# EAGLE board QL_keyboard (EAGLE 7.5.0)
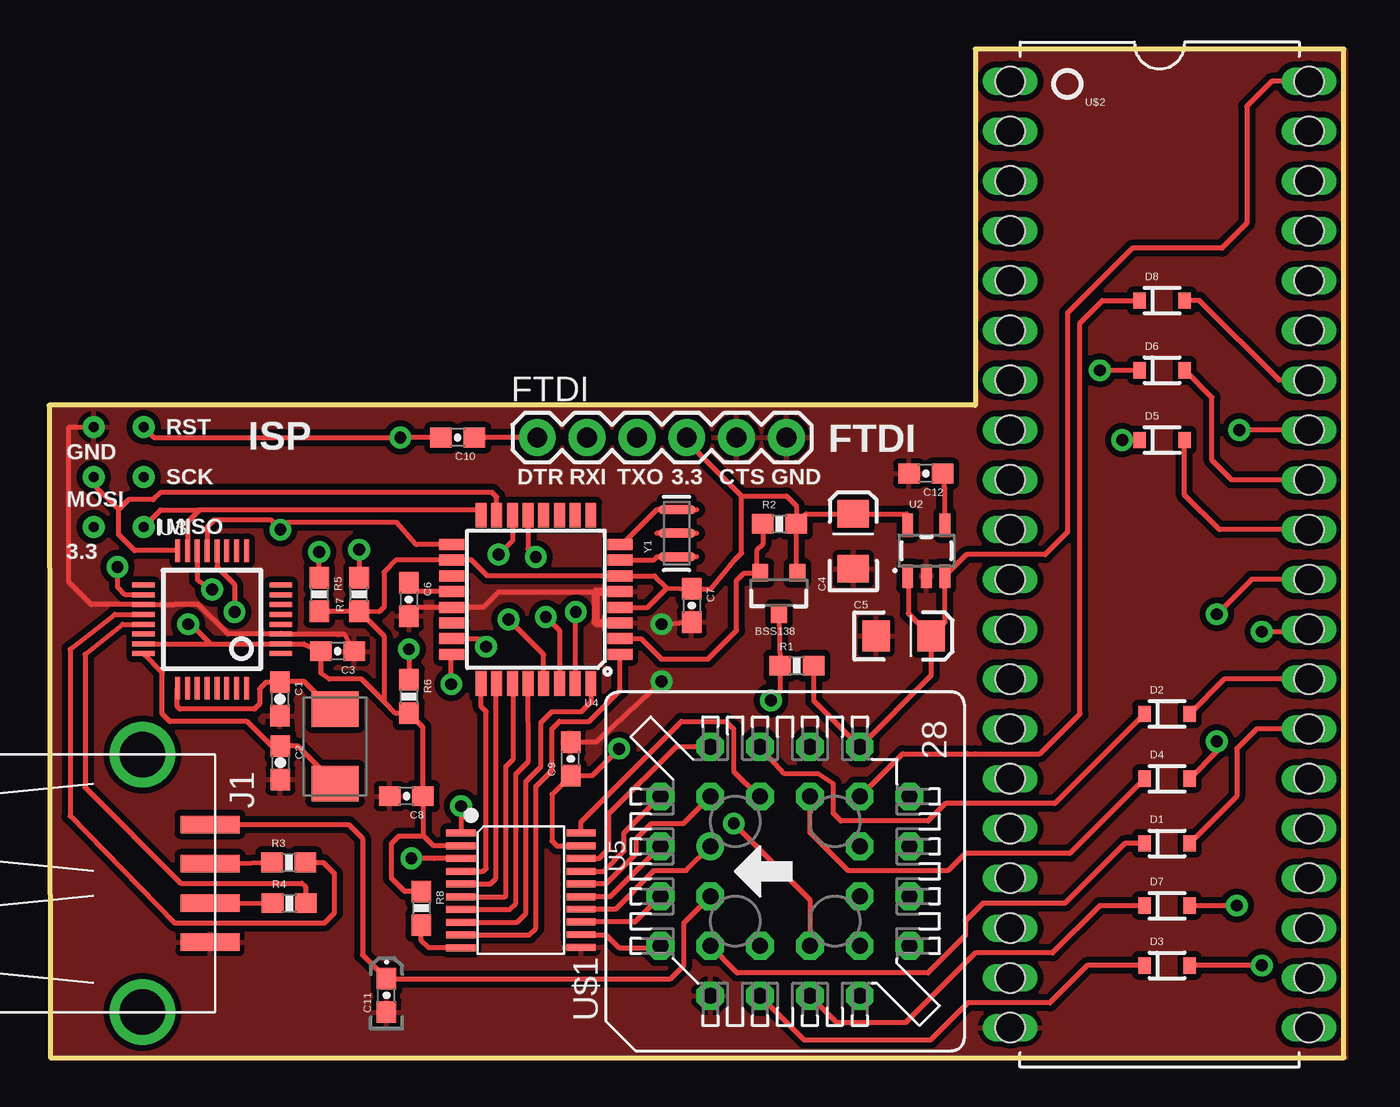
[diagram p0: board, top side]
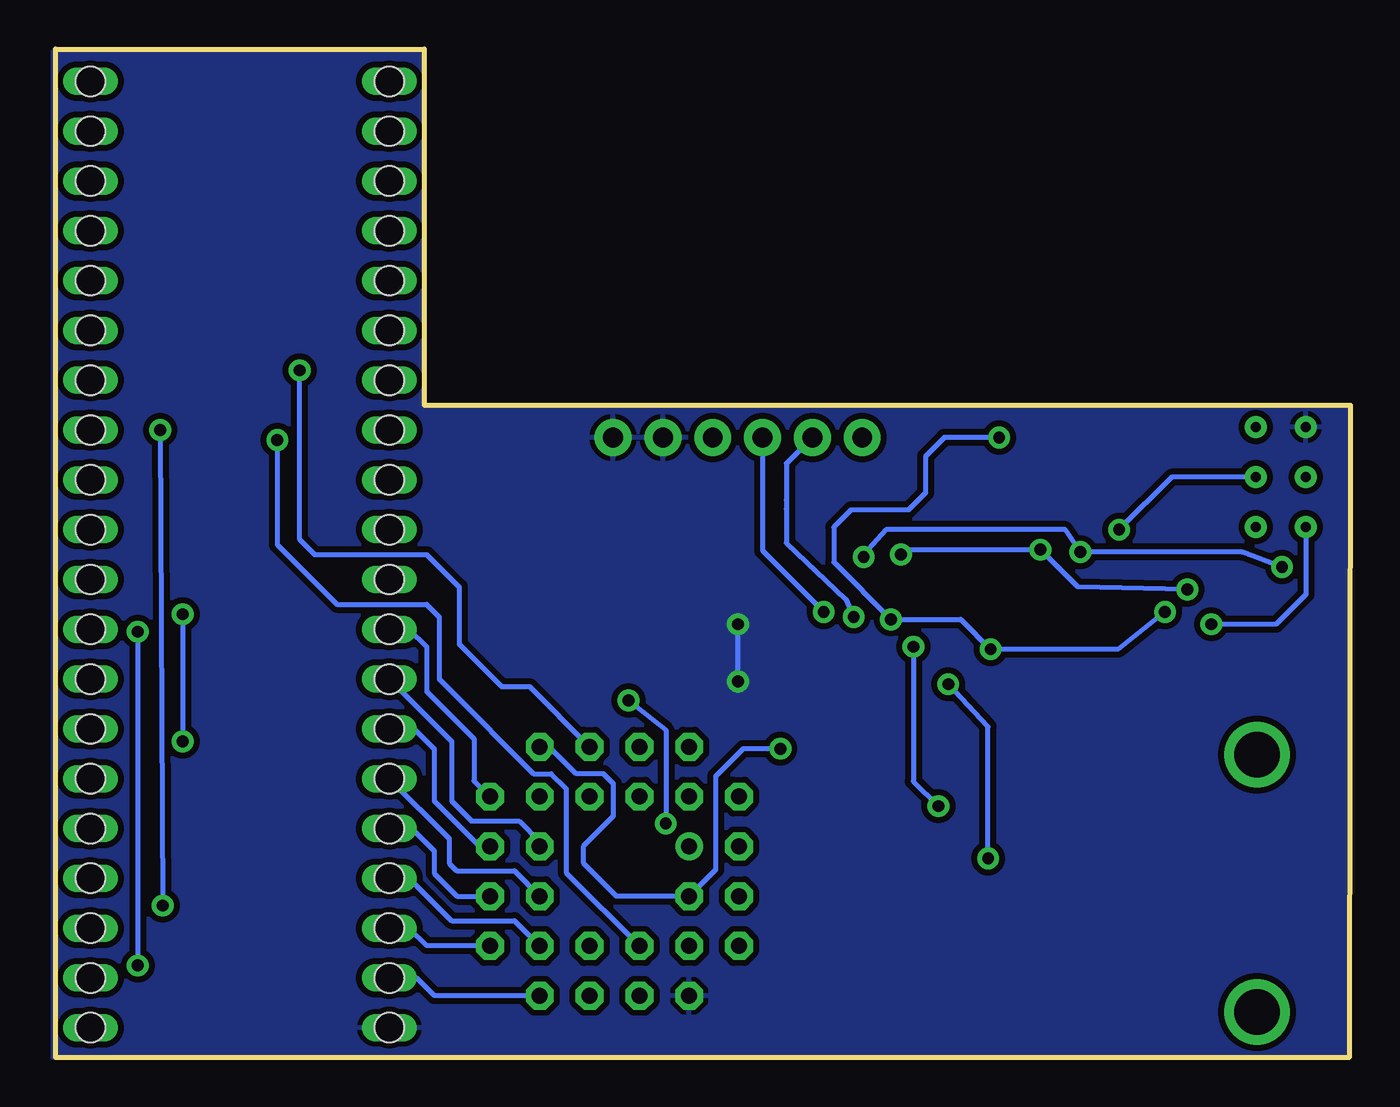
[diagram p1: board, bottom side, seen from below]

Size 66.03 x 51.44 mm. Coordinates in mm from the lower left corner, seen from the top.
Copper layers (1*16): Top 0.035mm / dielectric 1.5mm / Bottom 0.035mm
Design rules "SeeedStudio_2layer_DRU_no_angle_20140221 *": minimum track width 10mil, minimum drill 12mil, track to track 8mil, track to pad 8mil, pad to pad 8mil, via to via 10mil, smd to smd 0mil, copper to edge 10mil, drill to drill 10mil, minimum pad ring 12mil, minimum via ring 10mil, stop-mask expansion 2mil, vias tented up to drill 100mil, thermal gap 10mil
Milling: area 0,0 to 66,51.4

## Footprints (pad centres in the part's own frame; a part is rotated, then mirrored left to right if it is on the bottom)
SOT23-3 = smd 0.8 x 0.9: 1 -0.95,-1; 2 0.95,-1; 3 0,1.1
0603-CAP = smd 1.1 x 1: 1 -0.85,0; 2 0.85,0
EIA3216 = smd 1.4 x 1.6: A 1.4,0; C -1.4,0
0603-POL = smd 1.1 x 1: A 0.85,0; K -0.85,0
SOD-323 = smd 0.63 x 0.83: A 1.15,0; C -1.15,0
1X06 = drill 1.016 pad 1.88: 1 0,0; 2 2.54,0; 3 5.08,0; 4 7.62,0; 5 10.16,0; 6 12.7,0
USB-A-S = smd 3 x 0.9: D+ 3.45,-1; D- 3.45,1; GND 3.45,-3; VBUS 3.45,3 | drill 2.311: P$5 0,-6.566; P$6 0,6.566
2X3_TEST_POINTS = drill 0.508: 1 -2.54,-1.27; 2 -2.54,1.27; 3 0,-1.27; 4 0,1.27; 5 2.54,-1.27; 6 2.54,1.27
0603-RES = smd 1.1 x 1: 1 -0.85,0; 2 0.85,0
SOT23-5 = smd 0.55 x 1.2: 1 -0.95,-1.3; 2 0,-1.3; 3 0.95,-1.3; 4 0.95,1.3; 5 -0.95,1.3
TQFP32-5MM = smd 1.143 x 0.254: 1 -3.5,1.75; 2 -3.5,1.25; 3 -3.5,0.75; 4 -3.5,0.25; 5 -3.5,-0.25; 6 -3.5,-0.75; 7 -3.5,-1.25; 8 -3.5,-1.75; 17 3.5,-1.75; 18 3.5,-1.25; 19 3.5,-0.75; 20 3.5,-0.25; 21 3.5,0.25; 22 3.5,0.75; 23 3.5,1.25; 24 3.5,1.75 | smd 0.254 x 1.143: 9 -1.75,-3.5; 10 -1.25,-3.5; 11 -0.75,-3.5; 12 -0.25,-3.5; 13 0.25,-3.5; 14 0.75,-3.5; 15 1.25,-3.5; 16 1.75,-3.5; 25 1.75,3.5; 26 1.25,3.5; 27 0.75,3.5; 28 0.25,3.5; 29 -0.25,3.5; 30 -0.75,3.5; 31 -1.25,3.5; 32 -1.75,3.5
TQFP32-08 = smd 1.27 x 0.559: 1 -4.293,2.8; 2 -4.293,2; 3 -4.293,1.2; 4 -4.293,0.4; 5 -4.293,-0.4; 6 -4.293,-1.2; 7 -4.293,-2; 8 -4.293,-2.8; 17 4.293,-2.8; 18 4.293,-2; 19 4.293,-1.2; 20 4.293,-0.4; 21 4.293,0.4; 22 4.293,1.2; 23 4.293,2; 24 4.293,2.8 | smd 0.559 x 1.27: 9 -2.8,-4.293; 10 -2,-4.293; 11 -1.2,-4.293; 12 -0.4,-4.293; 13 0.4,-4.293; 14 1.2,-4.293; 15 2,-4.293; 16 2.8,-4.293; 25 2.8,4.293; 26 2,4.293; 27 1.2,4.293; 28 0.4,4.293; 29 -0.4,4.293; 30 -1.2,4.293; 31 -2,4.293; 32 -2.8,4.293
TSSOP20-0.65-6.5X4.4MM = smd 0.35 x 1.5: 1 -2.925,-3.065; 2 -2.275,-3.065; 3 -1.625,-3.065; 4 -0.975,-3.065; 5 -0.325,-3.065; 6 0.325,-3.065; 7 0.975,-3.065; 8 1.625,-3.065; 9 2.275,-3.065; 10 2.925,-3.065; 11 2.91,3.065; 12 2.26,3.065; 13 1.61,3.065; 14 0.96,3.065; 15 0.325,3.065; 16 -0.325,3.065; 17 -0.975,3.065; 18 -1.625,3.065; 19 -2.275,3.065; 20 -2.925,3.065
S28 = drill 0.813: 1 1.27,3.81 | drill 0.813 octagon: 2 -1.27,6.35; 3 -1.27,3.81; 4 -3.81,6.35; 5 -6.35,3.81; 6 -3.81,3.81; 7 -6.35,1.27; 8 -3.81,1.27; 9 -6.35,-1.27; 10 -3.81,-1.27; 11 -6.35,-3.81; 12 -3.81,-6.35; 13 -3.81,-3.81; 14 -1.27,-6.35; 15 -1.27,-3.81; 16 1.27,-6.35; 17 1.27,-3.81; 18 3.81,-6.35; 19 6.35,-3.81; 20 3.81,-3.81; 21 6.35,-1.27; 22 3.81,-1.27; 23 6.35,1.27; 24 3.81,1.27; 25 6.35,3.81; 26 3.81,6.35; 27 3.81,3.81; 28 1.27,6.35
DIL40 = drill 0.8 long: 1 -24.13,-7.62; 2 -21.59,-7.62; 3 -19.05,-7.62; 4 -16.51,-7.62; 5 -13.97,-7.62; 6 -11.43,-7.62; 7 -8.89,-7.62; 8 -6.35,-7.62; 9 -3.81,-7.62; 10 -1.27,-7.62; 11 1.27,-7.62; 12 3.81,-7.62; 13 6.35,-7.62; 14 8.89,-7.62; 15 11.43,-7.62; 16 13.97,-7.62; 17 16.51,-7.62; 18 19.05,-7.62; 19 21.59,-7.62; 20 24.13,-7.62; 21 24.13,7.62; 22 21.59,7.62; 23 19.05,7.62; 24 16.51,7.62; 25 13.97,7.62; 26 11.43,7.62; 27 8.89,7.62; 28 6.35,7.62; 29 3.81,7.62; 30 1.27,7.62; 31 -1.27,7.62; 32 -3.81,7.62; 33 -6.35,7.62; 34 -8.89,7.62; 35 -11.43,7.62; 36 -13.97,7.62; 37 -16.51,7.62; 38 -19.05,7.62; 39 -21.59,7.62; 40 -24.13,7.62 | hole 1.5: -24.13,-7.62; -21.59,-7.62; -19.05,-7.62; -16.51,-7.62; -13.97,-7.62; -11.43,-7.62; -8.89,-7.62; -6.35,-7.62; -3.81,-7.62; -1.27,-7.62; 1.27,-7.62; 3.81,-7.62; 6.35,-7.62; 8.89,-7.62; 11.43,-7.62; 13.97,-7.62; 16.51,-7.62; 19.05,-7.62; 21.59,-7.62; 24.13,-7.62; 24.13,7.62; 21.59,7.62; 19.05,7.62; 16.51,7.62; 13.97,7.62; 11.43,7.62; 8.89,7.62; 6.35,7.62; 3.81,7.62; 1.27,7.62; -1.27,7.62; -3.81,7.62; -6.35,7.62; -8.89,7.62; -11.43,7.62; -13.97,7.62; -16.51,7.62; -19.05,7.62; -21.59,7.62; -24.13,7.62
CRYSTAL-SMD-5X3.2 = smd 1.8 x 2.4: 1 -1.9,0; 2 1.9,0
RESONATOR-SMD = smd 0.45 x 1.905: 1 -1.2,0; 2 0,0; 3 1.2,0

## Placement (x,y rotation side)
BSS138  200mA/50V  [SOT23-3]  37.22,23.72 180 top
C1  18pF  [0603-CAP]  11.77,18.29 270 top
C2  18pF  [0603-CAP]  11.8,15.03 270 top
C3  1.0uF  [0603-CAP]  14.72,20.72 180 top
C4  10uF  [EIA3216]  41.01,26.33 90 top
C5  10uF  [EIA3216]  43.57,21.5 0 top
C6  0.1uF  [0603-CAP]  18.35,23.36 270 top
C7  0.1uF  [0603-CAP]  32.77,23.06 270 top
C8  0.1uF  [0603-CAP]  18.22,13.33 180 top
C9  0.1uF  [0603-CAP]  26.61,15.24 90 top
C10  0.1uF  [0603-CAP]  20.84,31.62 180 top
C11  4.7uF  [0603-POL]  17.21,3.17 90 top
C12  470pF  [0603-CAP]  44.71,29.79 180 top
D1  BAT20J  [SOD-323]  57.01,10.92 0 top
D2  BAT20J  [SOD-323]  57.01,17.53 0 top
D3  BAT20J  [SOD-323]  57.01,4.7 0 top
D4  BAT20J  [SOD-323]  57.01,14.22 0 top
D5  BAT20J  [SOD-323]  56.76,31.5 0 top
D6  BAT20J  [SOD-323]  56.76,35.05 0 top
D7  BAT20J  [SOD-323]  57.01,7.75 0 top
D8  BAT20J  [SOD-323]  56.76,38.61 0 top
FTDI  1  [1X06]  24.9,31.62 0 top
J1  USB-A-S  [USB-A-S]  4.76,8.89 0 top
J2  AVR_SPI_PRG_6TESTPOINTS  [2X3_TEST_POINTS]  3.55,29.61 90 top
R1  10K  [0603-RES]  38.13,19.99 0 top
R2  10K  [0603-RES]  37.24,27.22 0 top
R3  33  [0603-RES]  12.23,9.95 0 top
R4  33  [0603-RES]  12.25,7.87 0 top
R5  2.2k  [0603-RES]  13.78,23.62 270 top
R6  10K  [0603-RES]  18.35,18.41 270 top
R7  2.2k  [0603-RES]  15.81,23.62 90 top
R8  2.2k  [0603-RES]  18.99,7.62 270 top
U2  3.3V/150mA  [SOT23-5]  44.74,25.85 0 top
U3  MAX3421ESMD  [TQFP32-5MM]  8.32,22.35 180 top
U4  ATMEGA328P_TQFP  [TQFP32-08]  24.83,23.36 180 top
U5  TXB0108PW-TSSOP20  [TSSOP20-0.65-6.5X4.4MM]  24.07,8.53 270 top
U$1  MT8808  [S28]  37.53,9.5 90 top
U$2  DIL40_SCKT  [DIL40]  56.63,25.65 270 top
XTAL-12MHZ  CRYSTAL-SMD  [CRYSTAL-SMD-5X3.2]  14.59,15.87 270 top
Y1  8MHZ  [RESONATOR-SMD]  32.01,26.74 90 top

## Library data of the parts
BSS138 = SparkFun-DiscreteSemi; PROD_ID: TRANS-00830
C1 C2 = SparkFun-Passives
C3 = SparkFun-Capacitors; PROD_ID: CAP-00868
C4 C5 = SparkFun-Capacitors; PROD_ID: CAP-00811
C6-C10 C12 = SparkFun-Capacitors; PROD_ID: CAP-07888
C11 = SparkFun-Capacitors; PROD_ID: CAP-13210
D1-D8 = SparkFun-DiscreteSemi; PROD_ID: DIO-11623
FTDI J1 J2 = SparkFun-Connectors
R1 R2 R6 = SparkFun-Resistors; PROD_ID: RES-00824
R3 R4 = SparkFun-Resistors; PROD_ID: RES-08270
R5 R7 R8 = SparkFun-Resistors; PROD_ID: RES-08272
U2 = SparkFun-PowerIC; PROD_ID: VREG-00822
U3 = SparkFun-DigitalIC
U4 = SparkFun-DigitalIC; PROD_ID: IC-09069
U5 = Seeed-OPL-ic; MPN: TXB0108PW
U$1 U$2 XTAL-12MHZ = ppe_custom
Y1 = SparkFun-FreqCtrl; PROD_ID: XTAL-08895

## Nets
3.3V: BSS138.1 C3.2 C4.A C7.1 C8.1 FTDI.4 J2.2 R2.2 R5.2 R6.2 R7.1 R8.1 U2.5 U3.2 U3.23 U4.4 U4.6 U4.18 U5.2
AREF: C6.1 U4.20
AX0: U5.20 U$1.24
AX1: U5.18 U$1.25
AX2: U5.17 U$1.26
AY0: U5.16 U$1.27
AY1: U5.15 U$1.28
AY2: U5.14 U$1.1
DTR: C10.1 FTDI.1
GND: C1.2 C2.2 C3.1 C4.C C5.C C6.2 C7.2 C8.2 C9.2 C11.K C12.2 FTDI.5 FTDI.6 J1.GND J2.6 U2.2 U3.3 U3.19 U4.3 U4.5 U4.21 U5.11 U$1.5 U$2.20 Y1.2
INT: R5.1 U3.18 U4.13
MAX_X0: C1.1 U3.25 XTAL-12MHZ.1
MAX_X1: C2.1 U3.24 XTAL-12MHZ.2
MISO: J2.1 U3.15 U4.16
MOSI: J2.4 U3.16 U4.15
N$1: J1.D- R3.1
N$2: R3.2 U3.20
N$3: R4.2 U3.21
N$4: J1.D+ R4.1
N$5: C12.1 U2.4
N$6: U4.23 U5.1
N$7: U4.24 U5.3
N$8: U4.25 U5.4
N$9: U4.26 U5.5
N$10: U4.27 U5.6
N$11: U4.28 U5.7
N$12: U4.32 U5.8
N$13: U5.12 U$1.4
N$14: U5.13 U$1.2
N$15: U4.8 Y1.3
N$16: U4.7 Y1.1
N$17: R8.2 U5.10
N$18: U4.1 U5.9
N$19: D1.C U$1.6
N$20: D2.C U$1.23
N$21: D3.C U$1.7
N$22: D4.C U$1.22
N$23: D5.C U$1.8
N$24: D6.C U$1.21
N$25: D7.C U$1.9
N$26: D8.C U$1.20
RST: C10.2 J2.5 R6.1 U3.12 U4.29
RST8808V5: BSS138.3 R1.1 U$1.10
RST8808V33: BSS138.2 R2.1 U4.2
RXI: FTDI.2 U4.30
SCK: J2.3 U3.13 U4.17
SS: R7.2 U3.14 U4.14
TXO: FTDI.3 U4.31
VCC: C5.A C9.1 C11.A J1.VBUS R1.2 U2.1 U2.3 U5.19 U$1.3 U$1.19 U$2.40
X0: D1.A U$2.27
X1: D2.A U$2.28
X2: D3.A U$2.29
X3: D4.A U$2.30
X4: D5.A U$2.31
X5: D6.A U$2.32
X6: D7.A U$2.33
X7: D8.A U$2.34
Y0: U$1.18 U$2.12
Y1: U$1.17 U$2.13
Y2: U$1.16 U$2.14
Y3: U$1.15 U$2.15
Y4: U$1.14 U$2.16
Y5: U$1.13 U$2.17
Y6: U$1.12 U$2.18
Y7: U$1.11 U$2.19

## Tracks (layer width: path | path; a pad name or v marks a point on that pad's centre or on a via)
3.3V  (via drill 0.6)
  Top 0.254: BSS138.1 38.09,24.79 R2.2 38.11,27.24 | U3.23 8.24,21.1 | 8.24,21.1 U3.2 12.98,21.1 C3.2 13.87,19.59 14.29,19.3 15.94,19.3 17.08,18.16 | 31.5,23.95 C7.1 33.75,23.91 35.06,25.47 35.31,25.72 35.31,28.64 | 35.31,28.64 37.6,28.64 38.11,28.14 38.11,27.24 | 17.08,18.16 17.68,17.56 R6.2 19.07,16.84 C8.1 19.11,13.29 19.11,11.3 | R7.1 16.83,22.73 17.08,22.98 17.08,24.76 17.68,25.36 U4.18 21.56,25.36 22.36,24.57 U4.6 30.89,24.57 31.5,23.95 | R7.1 17.08,21.5 17.08,18.16 | R5.2 R7.1 | 38.11,27.24 38.6,27.73 C4.A 43.72,27.73 43.82,27.63 43.82,27.19 U2.5 | U5.2 19.61,10.81 19.11,11.3 | R8.1 18.13,8.47 17.46,9.14 17.46,10.92 17.84,11.3 19.11,11.3 | U4.4 30.52,22.96 31.5,23.95 | FTDI.4 32.52,31.44 35.31,28.64 | v7.1,22.1 7.25,22.1 8.24,21.1
  Bottom 0.254: J2.2 2.28,23.62 3.8,22.1 v7.1,22.1
AREF
  Top 0.254: U4.20 18.8,23.77 C6.1
AX0
  Top 0.254: U5.20 27.13,12.03 32.25,17.14 34.53,17.14 34.91,16.76 34.91,14.61 36.21,13.31 U$1.24
AX1
  Top 0.254: U5.18 28.05,10.16 28.56,10.67 28.56,12.45 31.99,15.88 33.69,15.88 U$1.25
AX2
  Top 0.254: U5.17 28.29,9.51 29.33,10.54 29.33,11.46 U$1.26
AY0
  Top 0.254: U$1.27 32.35,11.94 30.72,11.94 29.96,11.18 29.96,10.41 28.4,8.86 U5.16
AY1
  Top 0.254: U$1.28 28.62,8.21 U5.15
AY2
  Top 0.254: U$1.1 32.49,9.54 30.86,9.54 28.9,7.57 U5.14
DTR
  Top 0.254: FTDI.1 C10.1
GND  (via drill 0.6)
  Top 0.254: 11.82,21.64 U3.3 | 20.53,22.98 22.16,22.98 22.92,23.75 27.87,23.75 | 44.71,24.58 U2.2 | U3.3 15.06,21.6 C3.1 | U4.21 18.8,22.96 C6.2 | U3.3 9.12,21.6 7.61,23.11 6.41,23.11 U3.19 2.16,23.1 1,24.26 1,32.15 J2.6 | C9.2 27.89,16.09 v31.23,19.18 | v31.23,22.1 32.76,22.23 C7.2
  Top 0.406: U4.5 29.12,23.75 27.87,23.75 27.87,22.16 U4.3 | U4.21 20.53,22.98
  Bottom 0.254: v31.23,19.18 v31.23,22.1
  pour Top (isolate 0.305): 0.07,0 66.16,0 66.16,51.31 47.23,51.31 47.23,33.27 0.13,33.27
  pour Bottom (isolate 0.305): 0.12,0 66.16,0 66.16,51.31 47.23,51.31 47.23,33.27 0.12,33.27
INT  (via drill 0.6)
  Top 0.254: U4.13 24.43,25.92 v24.83,25.52 | R5.1 v13.78,25.78 | U3.18 3.89,23.6 3.49,24 v3.49,25.02
  Bottom 0.254: v24.83,25.52 24.83,25.65 23.68,26.92 14.54,26.92 v13.78,25.78 5.52,25.78 v3.49,25.02
MAX_X0
  Top 0.254: U3.25 6.54,18.82 6.54,17.9 6.67,17.78 10.48,17.78 10.73,18.03 10.73,18.79 11.07,19.14 C1.1 11.81,19.17 13.02,19.17 14.42,17.77 XTAL-12MHZ.1
MAX_X1
  Top 0.254: 5.03,20.6 U3.24 5.78,19.64 5.78,17.52 6.16,17.14 10.09,17.14 11.35,15.88 C2.1 12.68,15.88 XTAL-12MHZ.2
MISO
  Top 0.254: U4.16 21.75,27.94 7.68,27.94 | 7.68,27.94 7.07,27.32 U3.15 | J2.1 5.69,27.94 7.68,27.94
MOSI
  Top 0.254: U3.16 4.37,25.85 3.54,26.67 3.54,27.94 | 3.54,27.94 2.28,29.21 J2.4 | U4.15 22.83,28.6 22.6,28.83 5.7,28.83 5.32,28.45 4.05,28.45 3.54,27.94
N$1
  Top 0.254: J1.D- R3.1
N$2
  Top 0.254: R3.2 13.98,9.95 14.54,9.39 14.54,7.36 14.03,6.86 6.41,6.86 1.08,12.32 1.08,20.82 3.36,22.6 U3.20
N$3
  Top 0.254: R4.2 13.1,8.67 12.89,8.89 6.72,8.89 1.84,13.77 1.84,20.57 3.75,22.09 U3.21
N$4
  Top 0.254: J1.D+ R4.1
N$5
  Top 0.254: U2.4 45.69,29.03 C12.1
N$6  (via drill 0.6)
  Top 0.254: U4.23 21.87,21.36 v22.29,20.95 | v21.02,12.82 21.02,11.47 U5.1
  Bottom 0.254: v22.29,20.95 22.29,14.09 v21.02,12.82
N$7  (via drill 0.6)
  Top 0.254: U5.3 19.62,10.16 v18.48,10.16 | v20.51,19.05 20.51,20.54 U4.24
  Bottom 0.254: v18.48,10.16 18.48,16.89 v20.51,19.05
N$8
  Top 0.254: U5.4 22.14,9.51 22.29,9.65 22.29,17.65 22.03,17.9 U4.25
N$9
  Top 0.254: U5.5 22.51,8.86 22.79,9.14 22.79,19.04 U4.26
N$10
  Top 0.254: U5.6 23.26,8.21 23.3,8.25 23.3,14.86 23.68,15.24 23.68,19.02 U4.27
N$11
  Top 0.254: U5.7 23.5,7.56 23.81,7.87 23.81,14.47 24.45,15.11 U4.28
N$12
  Top 0.254: U5.8 23.86,6.91 24.32,7.36 24.32,14.09 25.08,14.86 25.08,17.09 25.64,17.65 27.17,17.65 27.68,18.16 U4.32
N$13
  Top 0.254: U5.12 28.4,6.27 29.07,5.6 31.09,5.6 U$1.4
N$14
  Top 0.254: U$1.2 29.87,6.92 U5.13
N$15
  Top 0.254: U4.8 29.22,26.16 31,27.94
N$16
  Top 0.254: 31.99,25.57 Y1.1 | U4.7 30.82,25.36 31,25.54
N$17
  Top 0.254: U5.10 19.35,5.61 18.99,5.97 R8.2
N$18
  Top 0.254: U5.9 24.48,6.26 24.83,6.6 24.83,13.84 25.64,14.66 25.64,16.76 26.02,17.14 27.55,17.14 29.12,18.72 U4.1
N$19
  Top 0.254: D1.C 54.85,10.92 51.8,7.87 47.61,7.87 46.72,6.99 46.72,6.22 44.82,4.32 35.09,4.32 U$1.6
N$20
  Top 0.254: D2.C 51.29,12.95 45.71,12.95 44.82,12.06 40.38,12.06 39.99,12.45 39.99,13.97 39.23,14.48 37.5,14.48 U$1.23
N$21
  Top 0.254: D3.C 52.95,4.7 51.04,2.79 46.85,2.79 44.95,0.89 38.52,0.89 U$1.7
N$22
  Top 0.254: D4.C 52.05,10.41 46.72,10.41 45.84,9.53 40.76,9.53 38.8,11.48 U$1.22
N$23  (via drill 0.6)
  Top 0.254: D5.C v54.73,31.5
  Bottom 0.254: v54.73,31.5 54.73,26.16 51.68,23.11 47.11,23.11 46.47,22.48 46.47,19.3 46.22,19.05 46.03,18.86 41.64,14.48 40.76,14.48 39.99,13.72 39.99,9.42 U$1.8
N$24  (via drill 0.6)
  Top 0.254: v53.58,35.05 D6.C
  Bottom 0.254: U$1.21 41.87,18.92 43.3,18.92 45.45,21.08 45.45,24 47.11,25.65 52.82,25.65 53.58,26.42 v53.58,35.05
N$25
  Top 0.254: D7.C 53.58,7.75 51.17,5.33 47.23,5.33 43.68,1.78 40.17,1.78 U$1.9
N$26
  Top 0.254: D8.C 53.71,38.61 52.57,37.47 52.57,17.53 50.53,15.49 47.23,15.49 46.85,15.49 43.53,15.49 U$1.20
RST  (via drill 0.6)
  Top 0.254: U4.29 25.23,20.55 v23.43,22.35 | v18.35,20.82 R6.1 | U3.12 8.57,25.02 9.46,24.13 v9.46,22.73 | C10.2 v17.91,31.62 5.34,31.62 J2.5
  Bottom 0.254: v9.46,22.73 11.87,20.82 v18.35,20.82 19.87,22.35 v23.43,22.35 26.35,25.27 26.35,27.05 25.46,27.94 22.54,27.94 21.67,28.8 21.67,30.66 20.71,31.62 v17.91,31.62
RST8808V5  (via drill 0.6)
  Top 0.254: v34.91,11.94 38.8,8.05 U$1.10 | v36.82,18.21 37.28,18.68 R1.1 BSS138.3
  Bottom 0.254: v36.82,18.21 34.91,16.71 v34.91,11.94
RST8808V33
  Top 0.254: R2.1 36.39,26.17 36.08,25.85 36.08,24.91 BSS138.2 36.26,24.71 35.44,24.71 35.06,24.33 35.06,21.79 33.59,20.32 31.23,20.32 30.19,21.36 U4.2
RXI  (via drill 0.6)
  Top 0.254: v25.33,22.48 26.03,21.78 U4.30
  Bottom 0.254: v25.33,22.48 25.72,23.36 28.76,26.25 28.76,28 28.76,28.45 28.76,30.3 FTDI.2
SCK  (via drill 0.6)
  Top 0.254: U4.17 18.72,26.16 17.71,27.3 12.18,27.3 v11.8,26.92 11.29,27.43 8.44,27.43 8.06,27.05 U3.13
  Bottom 0.254: J2.3 9.12,29.61 v11.8,26.92
SS  (via drill 0.6)
  Top 0.254: U4.14 23.63,26.36 v22.92,25.65 | v15.81,25.91 R7.2 | U3.14 7.57,24.37 v8.32,23.87
  Bottom 0.254: v22.92,25.65 22.67,25.91 v15.81,25.91 13.91,24 v8.32,23.87
TXO  (via drill 0.6)
  Top 0.254: U4.31 26.86,19.1 v26.86,22.73
  Bottom 0.254: FTDI.3 29.98,25.85 v26.86,22.73
VCC  (via drill 0.6)
  Top 0.254: U2.1 43.82,24.53 43.82,22.65 C5.A | 45.65,24.07 45.65,24.53 U2.3 | U$2.40 62.35,49.78 61.08,48.51 61.08,42.55 59.81,41.27 55.23,41.27 51.93,37.97 51.93,26.8 50.79,25.65 46.79,25.65 U2.3 | C5.A 45.69,22.21 U2.3 | v29.07,15.75 27.71,14.39 C9.1 25.64,13.43 25.64,11.05 25.9,10.79 U5.19 | R1.2 38.98,18.21 U$1.19 44.97,19.48 C5.A | C11.A 31.7,4.02 32.37,4.7 32.37,6.88 U$1.3 | 16.88,4.35 C11.A | J1.VBUS 15.28,11.89 15.99,11.18 15.99,5.24 C11.A
  Bottom 0.254: U$1.19 40.86,15.85 39.49,14.48 38.09,14.48 37.58,13.97 37.58,12.32 39.11,10.79 39.11,9.91 37.43,8.23 U$1.3 32.37,9.58 32.37,14.35 30.98,15.75 v29.07,15.75
X0
  Top 0.254: D1.A 60.57,13.33 60.57,15.75 61.58,16.76 U$2.27
X1
  Top 0.254: D2.A 59.94,19.3 U$2.28
X2  (via drill 0.6)
  Top 0.254: 61.96,21.84 v61.84,21.72 | v61.84,4.7 D3.A | 61.84,21.84 v61.84,21.72 | U$2.29 64.12,21.72 v61.84,21.72
  Bottom 0.254: v61.84,21.72 v61.84,4.7
X3  (via drill 0.6)
  Top 0.254: v59.55,22.61 61.33,24.38 U$2.30 | v59.55,16.13 59.55,15.61 D4.A
  Bottom 0.254: v59.55,22.61 v59.55,16.13
X4
  Top 0.254: D5.A 57.9,31.49 57.9,28.7 59.68,26.92 U$2.31
X5
  Top 0.254: D6.A 59.3,33.66 59.3,30.48 60.31,29.46 U$2.32
X6  (via drill 0.6)
  Top 0.254: v60.57,7.75 D7.A | U$2.33 v60.69,32
  Bottom 0.254: v60.69,32 v60.57,7.75
X7
  Top 0.254: D8.A 58.66,38.61 62.73,34.54 U$2.34
Y0
  Bottom 0.254: U$2.12 48,21.84 47.11,20.95 47.11,18.67 44.69,16.26 44.69,14.12 U$1.18
Y1
  Bottom 0.254: U$2.13 45.84,16.13 45.84,13.08 44.82,12.06 42.41,12.06 41.34,11 U$1.17
Y2
  Bottom 0.254: U$2.14 47.74,16.76 46.72,15.75 46.72,13.08 44.41,10.77 U$1.16
Y3
  Bottom 0.254: U$2.15 45.96,11.18 45.96,9.91 45.58,9.53 42.64,9.53 U$1.15
Y4
  Bottom 0.254: U$2.16 47.87,11.68 46.72,10.54 46.72,9.4 45.56,8.23 U$1.14
Y5
  Bottom 0.254: U$2.17 48,9.14 45.84,6.99 42.64,6.99 U$1.13
Y6
  Bottom 0.254: U$2.18 48,6.6 47.11,5.71 43.91,5.71 U$1.12
Y7
  Bottom 0.254: U$2.19 47.61,4.06 46.72,3.17 41.37,3.17 U$1.11

## Text on the board
tPlace: RST | ISP | FTDI | GND | SCK | DTR | RXI | TXO | 3.3 | CTS | GND | MOSI | MISO | 3.3